# Altium PCB FLUKE_USB_IR.PcbDoc
Units mil, origin at the board's own origin, x right, y up, seen from the top; angles counter-clockwise.
Board outline 1980 x 900 mil, 2 copper layers (Top Layer, Bottom Layer); 20 components, 17 nets, 79 pads, 14 vias.
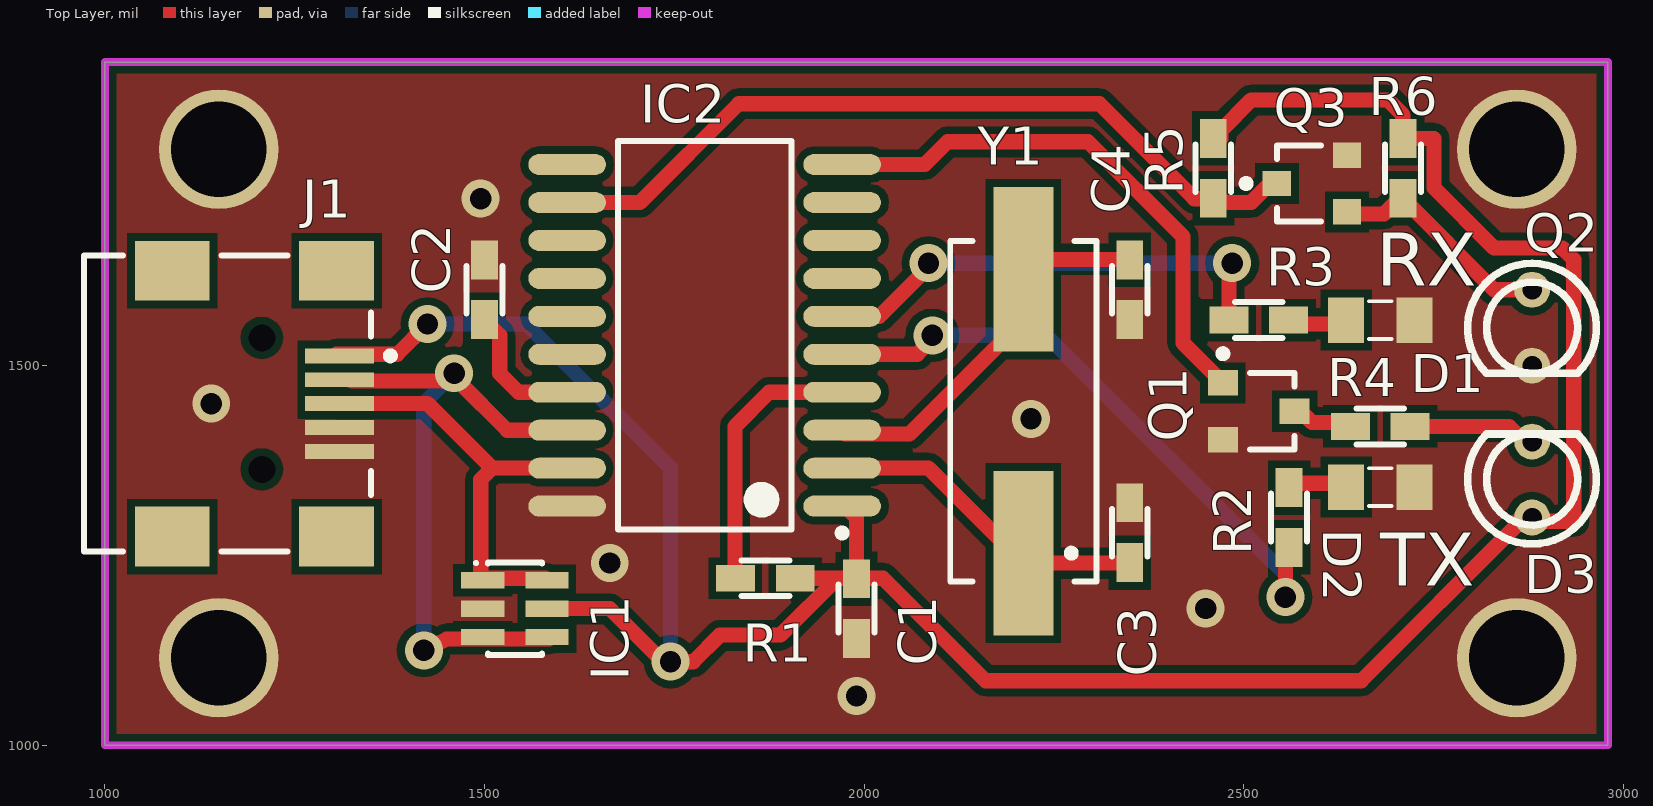
[diagram p0: Top Layer view]
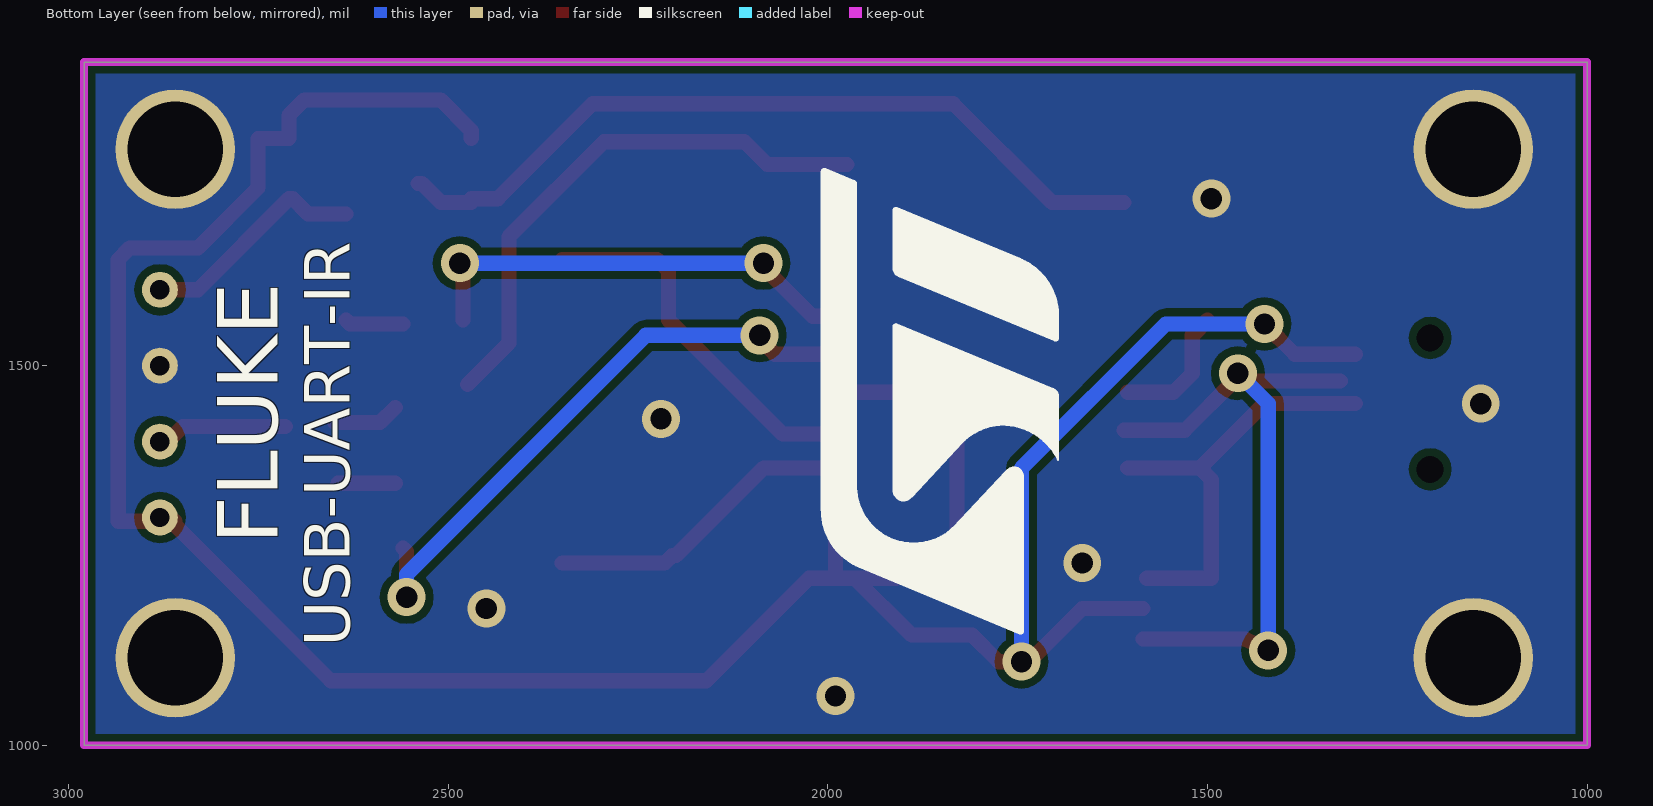
[diagram p1: Bottom Layer view, seen from below]

## Layer stack, top to bottom
Top Layer: signal copper 1.4
Dielectric: dielectric 12.6, FR-4, Dk 4.8
Bottom Layer: signal copper 1.4

## Board outline
1000,1000 2980,1000 2980,1900 1000,1900

## Design rules (kind name [scope] priority, off if disabled: settings)
Clearance [All] p1: gap=10
ComponentClearance [All] p1: gap=10 collisioncheckmode=3 verticalgap=10
HoleSize [All] p1: absolutevalues=TRUE maxlimit=196.85 minlimit=0.98 maxpercent=80.000 minpercent=20.000
PolygonConnect [All] p1: connectstyle=Direct reliefconductorwidth=10 reliefentries=4 polygonreliefangle="90 Angle"
RoutingVias [All] p1: holewidth=28 width=50 viastyle="Through Hole" minholewidth=28 minwidth=50 maxholewidth=28 maxwidth=50
SolderMaskExpansion [All] p1: expansion=4
TestPointUsage [All] p1: valid=0 allowmultiple=FALSE
Testpoint [All] p1: side=15 testpointundercomponent=TRUE minsize=40 maxsize=100 preferedsize=60 minholesize=0 maxholesize=40 preferedholesize=32 testpointgrid=1 style=1023 order=0-112345678
Width [All] p1: maxlimit=50 minlimit=10 preferedwidth=10 minimp=50.000000 maximp=50.000000 favimp=50.000000
17 further rules are at their usual default settings.

## Components (designator, comment, footprint, x,y, rotation, side; value= is the part's Value field where it differs from the comment)
C1 "Cap" 0603 1990,1180 r90 top
C2 "Cap" 0603 1500,1600 r270 top
C3 "Cap" 0603 2350,1280 r90 top
C4 "Cap" 0603 2350,1600 r270 top
D1 "LED" 0805 2680,1560 r180 top
D2 "LED" 0805 2680,1340 r180 top
D3 "15400385A3590" LED_3MM 2880,1350 r90 top
IC1 "USBLC6-2" SOT23-6 1540,1180 r270 top
IC2 "MCP2200" SOIC300-20_M 1790,1540 r180 top
J1 "QJ/XYT-12137" 440247 1000,1450 r180 top
Q1 "BSS138" SOT23-3 2520,1440 r270 top
Q2 "BPW85" LED_3MM 2880,1550 r270 top
Q3 "BC847B" TO-236AB 2590,1740 r90 top
R1 "Res" 0603 1870,1220 r0 top
R2 "Res" 0603 2560,1300 r90 top
R3 "Res" 0603 2520,1560 r0 top
R4 "Res" 0603 2680,1420 r0 top
R5 "Res" 0603 2460,1760 r90 top
R6 "Res" 0603 2710,1760 r90 top
Y1 "12MHz" HC49/4H_SMX 2210,1440 r90 top

## Footprints (in the part's own frame and the unit in brackets; to place one, negate y for a bottom-side part, rotate by r counter-clockwise, add the part's x,y. Pads: shape width x height; smd on the part's side, far side on the other; paste and mask are expansions set on the pad)
0603 [mm]
  rect 1.3x0.9 smd: 1(-1,0) 2(1,0)
  silkscreen extent -0.8,-0.6 0.8,0.6, body extent -0.8,-0.4 0.8,0.4, height 0.5
0805 [mil]
  round 30 on Mech7: 0(0,0)
  rect 47.24x60 smd: 1(45,0) 2(-45,0)
  silkscreen extent -15,-25 15,25, body extent -72,-34 72,34
440247 [mm] "Connector; USB2.0, Type B, SM; 5 Position; Right Angle"
  rect 2.3x0.5 smd: 1(-7.85,-1.6) 2(-7.85,-0.8) 3(-7.85,0) 4(-7.85,0.8) 5(-7.85,1.6)
  rect 2.5x2 smd: 6(-7.75,4.45) 7(-2.25,4.45) 8(-7.75,-4.45) 9(-2.25,-4.45)
  round 0.6 hole 0.9 unplated: MH1(-5.25,2.2) MH2(-5.25,-2.2)
  silkscreen extent -9.68,-4.95 0.7,4.95
HC49/4H_SMX [mm] "Surface Mount Quartz Crystal; Body 13.4 (inc. leads) x 4.9 mm (LxW max)"
  rect 5.5x2 smd: 1(-4.75,0) 2(4.75,0)
  silkscreen extent -5.7,-2.45 5.7,2.45
LED_3MM [mm] "LED Standard 3mm"
  round 1.2 hole 0.65: 1(-1.27,0) 2(1.27,0)
  silkscreen extent -2.16,-2.15 1.52,2.15
SOIC300-20_M [mm] "20-Pin Plastic Wide Body Small Outline Integrated Circuit 1.27 mm Pitch, IPC Low Density"
  oval 2.6x0.7 smd: 1(-4.6,5.715) 2(-4.6,4.445) 3(-4.6,3.175) 4(-4.6,1.905) 5(-4.6,0.635) 6(-4.6,-0.635) 7(-4.6,-1.905) 8(-4.6,-3.175) 9(-4.6,-4.445) 10(-4.6,-5.715) 11(4.6,-5.715) 12(4.6,-4.445) 13(4.6,-3.175) 14(4.6,-1.905) 15(4.6,-0.635) 16(4.6,0.635) 17(4.6,1.905) 18(4.6,3.175) 19(4.6,4.445) 20(4.6,5.715)
  silkscreen extent -4.72,-6.5 2.9,6.74, body extent -3.75,-6.5 3.75,6.5, height 2.65
SOT23-3 [mm] "SOT-23; 3 Leads; Body 3.0 x 2.5 mm, inc. leads (LxW max)"
  rect 0.85x1 smd: 1(-0.95,-1.2) 2(0.95,-1.2) 3(0,1.2)
  silkscreen extent -2.05,-1.32 1.28,1.2
SOT23-6 [mm] "SOT-23/SC-74A; 5 Leads; Body 3.1 x 3 mm, inc. leads (LxW max)"
  rect 0.55x1.45 smd: 1(-0.95,-1.075) 2(0,-1.075) 3(0.95,-1.075) 4(0.95,1.075) 5(0,1.075) 6(-0.95,1.075)
  silkscreen extent -1.57,-1.35 1.55,0.9
TO-236AB [mm] "SOT-23; 3 Leads; Body 3.0 x 2.5 mm, inc. leads (LxW max), Alternate Lead Configuration"
  rect 0.85x0.95 smd: 1(0,1.175) 2(-0.95,-1.175) 3(0.95,-1.175)
  silkscreen extent -1.27,-0.3 1.28,2.32

## Part data
C1 C2 C3 C4: "Capacitor"
D3: library part LED
IC1: "Very low capacitance ESD protection diode array"
IC2: "USB 2.0 to UART Protocol Converter with GPIO"
J1: library part 440247-1, "USB 2.0, Right Angle, SMT, B Type, Receptacle, 5 Position, Black"
Q1: "MOSFET SOT-23 N-CH LOGIC LEVEL"
Q2: library part Phototransistor, "Phototransistor"
Q3: library part BSS138, "MOSFET SOT-23 N-CH LOGIC LEVEL"
R1 R2 R3 R4 R5 R6: "Resistor"
Y1: library part HC49/4H_SMX, "Surface Mount Quartz Crystal"

## Free pads (board coordinates)
  round 157.48 hole 125.98: 3.2mm(1150,1115) 3.2mm(1150,1785) 3.2mm(2860,1115) 3.2mm(2860,1785)

## Via types
v1: diameter 50, hole 28, Top Layer to Bottom Layer, 14 vias

## Nets (pads, with @x,y where several pads share a name; then routed paths per layer and width w, separated by ;. In a path a pad name is that pad's centre, name@x,y a point inside that pad or via, vN(x,y) a via of type N, cw(c..) or ccw(c..) an arc to the next point about the centre after c; other vN are vias at no path point)
+5V: C1.2 D3.1 IC1.5 IC2.1 J1.1 R1.2 R5.2 R6.2 | length 3496.4
  Top Layer w20: J1.1@1305,1515 1385,1515 v1(1425,1555) ; IC1.5@1585,1180 1665,1180 1735,1110 1775,1110 1810,1145 1890,1145 1965,1220 ; R1.2@1910,1220 2025,1220 2160,1085 2655,1085 2860,1290 2860,1295 2935,1295 2935,1640 2920,1655 2830,1655 2750.63,1734.37 2750.63,1799.37 R6.2 ; IC2.1@1975,1315 1990,1300 C1.2@1990,1220 ; R5.2@2470,1799.37 2470,1810 2510,1850 2690,1850 2710,1830 R6.2@2710,1800
  Bottom Layer w20: v1(1425,1555) 1555,1555 1745,1365 v1(1745,1110)
DM: IC1.3 IC1.4 IC2.18 J1.2 | length 858.4
  Top Layer w20: J1.2@1325,1480 1465,1480 1530,1415 IC2.18@1610,1415 ; v1(1420,1125) 1420.14,1126.77 1450,1139.14 1450,1140 IC1.3@1495,1140 ; IC1.3@1500,1140 IC1.4@1585,1140
  Bottom Layer w20: v1(1420,1125) 1420,1450 v1(1460,1490)
DP: IC1.1 IC1.6 IC2.19 J1.3 | length 571.4
  Top Layer w20: J1.3@1305,1450 1425,1450 1510,1365 ; IC1.6@1580,1220 1495,1220 1495,1350 1510,1365 ; IC2.19@1605,1365 1510,1365
GND: C1.1 C2.1 C3.2 C4.2 D1.2 D2.2 IC1.2 IC2.20 J1.4 J1.5 pad.3.2mm Q1.2 Q2.2 Q3.3
  other v1: 1990,1065 2450,1180 1665,1240 2220,1430 1140,1450 1495,1720
NetD1_1: D1.1 R3.2 | length 77.1
  Top Layer w20: R3.2@2560,1555 2630,1555 D1.1
NetD2_1: D2.1 R2.2 | length 75.6
  Top Layer w20: R2.2@2570,1345 D2.1@2645.63,1345
NetD3_2: D3.2 R4.2 | length 177.4
  Top Layer w20: R4.2@2715,1420 2850,1420 D3.2@2880,1390
NetQ1_3: Q1.3 R4.1 | length 88.3
  Top Layer w20: Q1.3@2570,1445 2590,1425 R4.1@2650,1425
OSC1: C3.1 IC2.2 Y1.1 | length 426.8
  Top Layer w20: IC2.2@1975,1365 2085,1365 2200,1250 2205,1250 2215,1240 C3.1@2350,1240
OSC2: C4.1 IC2.3 Y1.2 | length 508.3
  Top Layer w20: IC2.3@1975,1410 2060,1410 2210,1560 2210,1625 2225,1640 C4.1@2350,1640
PTC: Q2.1 Q3.2 R6.1 | length 278
  Top Layer w20: Q3.2@2635,1700 2685,1700 R6.1@2705,1720 ; R6.1@2710,1720 2830,1600 Q2.1@2860,1600
RST: IC2.4 R1.1 | length 363.6
  Top Layer w20: R1.1@1830,1220 1830,1420 1875,1465 IC2.4@1975,1465
RX: IC2.12 Q3.1 R5.1 | length 1046
  Top Layer w20: IC2.12@1610,1715 1705,1715 1835,1845 2310,1845 2435,1720 R5.1@2470,1720 ; R5.1@2470,1715 2510,1715 2535,1740 Q3.1@2540,1740
RXLED: IC2.6 R3.1 | length 620.8
  Top Layer w20: IC2.6@1975,1565 2020,1565 v1@2090,1635 ; R3.1 2480.63,1630.63 v1(2485,1635)
  Bottom Layer w20: v1(2085,1635) v1(2485,1635)
TX: IC2.10 Q1.1 | length 727
  Top Layer w20: IC2.10@1975,1765 2080,1765 2110,1795 2295,1795 2420,1670 2420,1530 Q1.1@2475,1475
TXLED: IC2.5 R2.1 | length 822.9
  Top Layer w20: IC2.5@1975,1515 2070,1515 v1@2095,1540 ; v1(2555,1195) 2555,1255 R2.1@2560,1260
  Bottom Layer w20: v1(2090,1540) 2240,1540 2555,1225 v1(2555,1195)
VUSB: C2.2 IC2.17 | length 173.6
  Top Layer w20: C2.2@1500,1560 1520,1540 1520,1490 1545,1465 IC2.17@1605,1465
pads on no net: D1.0 D2.0 IC2.7 IC2.8 IC2.9 IC2.11 IC2.13 IC2.14 IC2.15 IC2.16 J1.6 J1.7 J1.8 J1.9 J1.MH1 J1.MH2

## Polygon pours and split planes (outlines as drawn)
GND on Top Layer "Bottom Layer-No Net" (solid, remove dead copper, pour order 1000): 1000,1000 2980,1000 2980,1900 1000,1900
GND on Bottom Layer "Bottom Layer-No Net" (solid, remove dead copper, pour order 1001): 1000,1000 2980,1000 2980,1900 1000,1900

## Keep-outs
Keep-Out Layer:
  the board outline again, w10

## Silkscreen, mask and mechanical layers (free items; w line width, h text height)
Top Overlay:
  text "RX" at 2675,1605 h70
  text "TX" at 2680,1210 h70
Bottom Overlay:
  drawing of 3 lines, arcs and shapes, not listed
  text "FLUKE" at 2725,1265 h80 r270
  text "USB-UART-IR" at 2630,1130 h60 r270
Mechanical 15:
  text "51x23mm" at 1005,1920 h60

## Text inside footprints (layer, text, board x,y; h text height)
J1: Mechanical 1 "PCB Edge" at 982.98,1608.91 h9.84 r270